# Altium PCB PCB_Timer.PcbDoc
Units mm, origin at the board's own origin, x right, y up, seen from the top; angles counter-clockwise.
Board outline 100 x 100 mm, 2 copper layers (Top Layer, Bottom Layer); 36 components, 40 nets, 182 pads, 0 vias.
Unrouted connection lines stored in the file: 4.
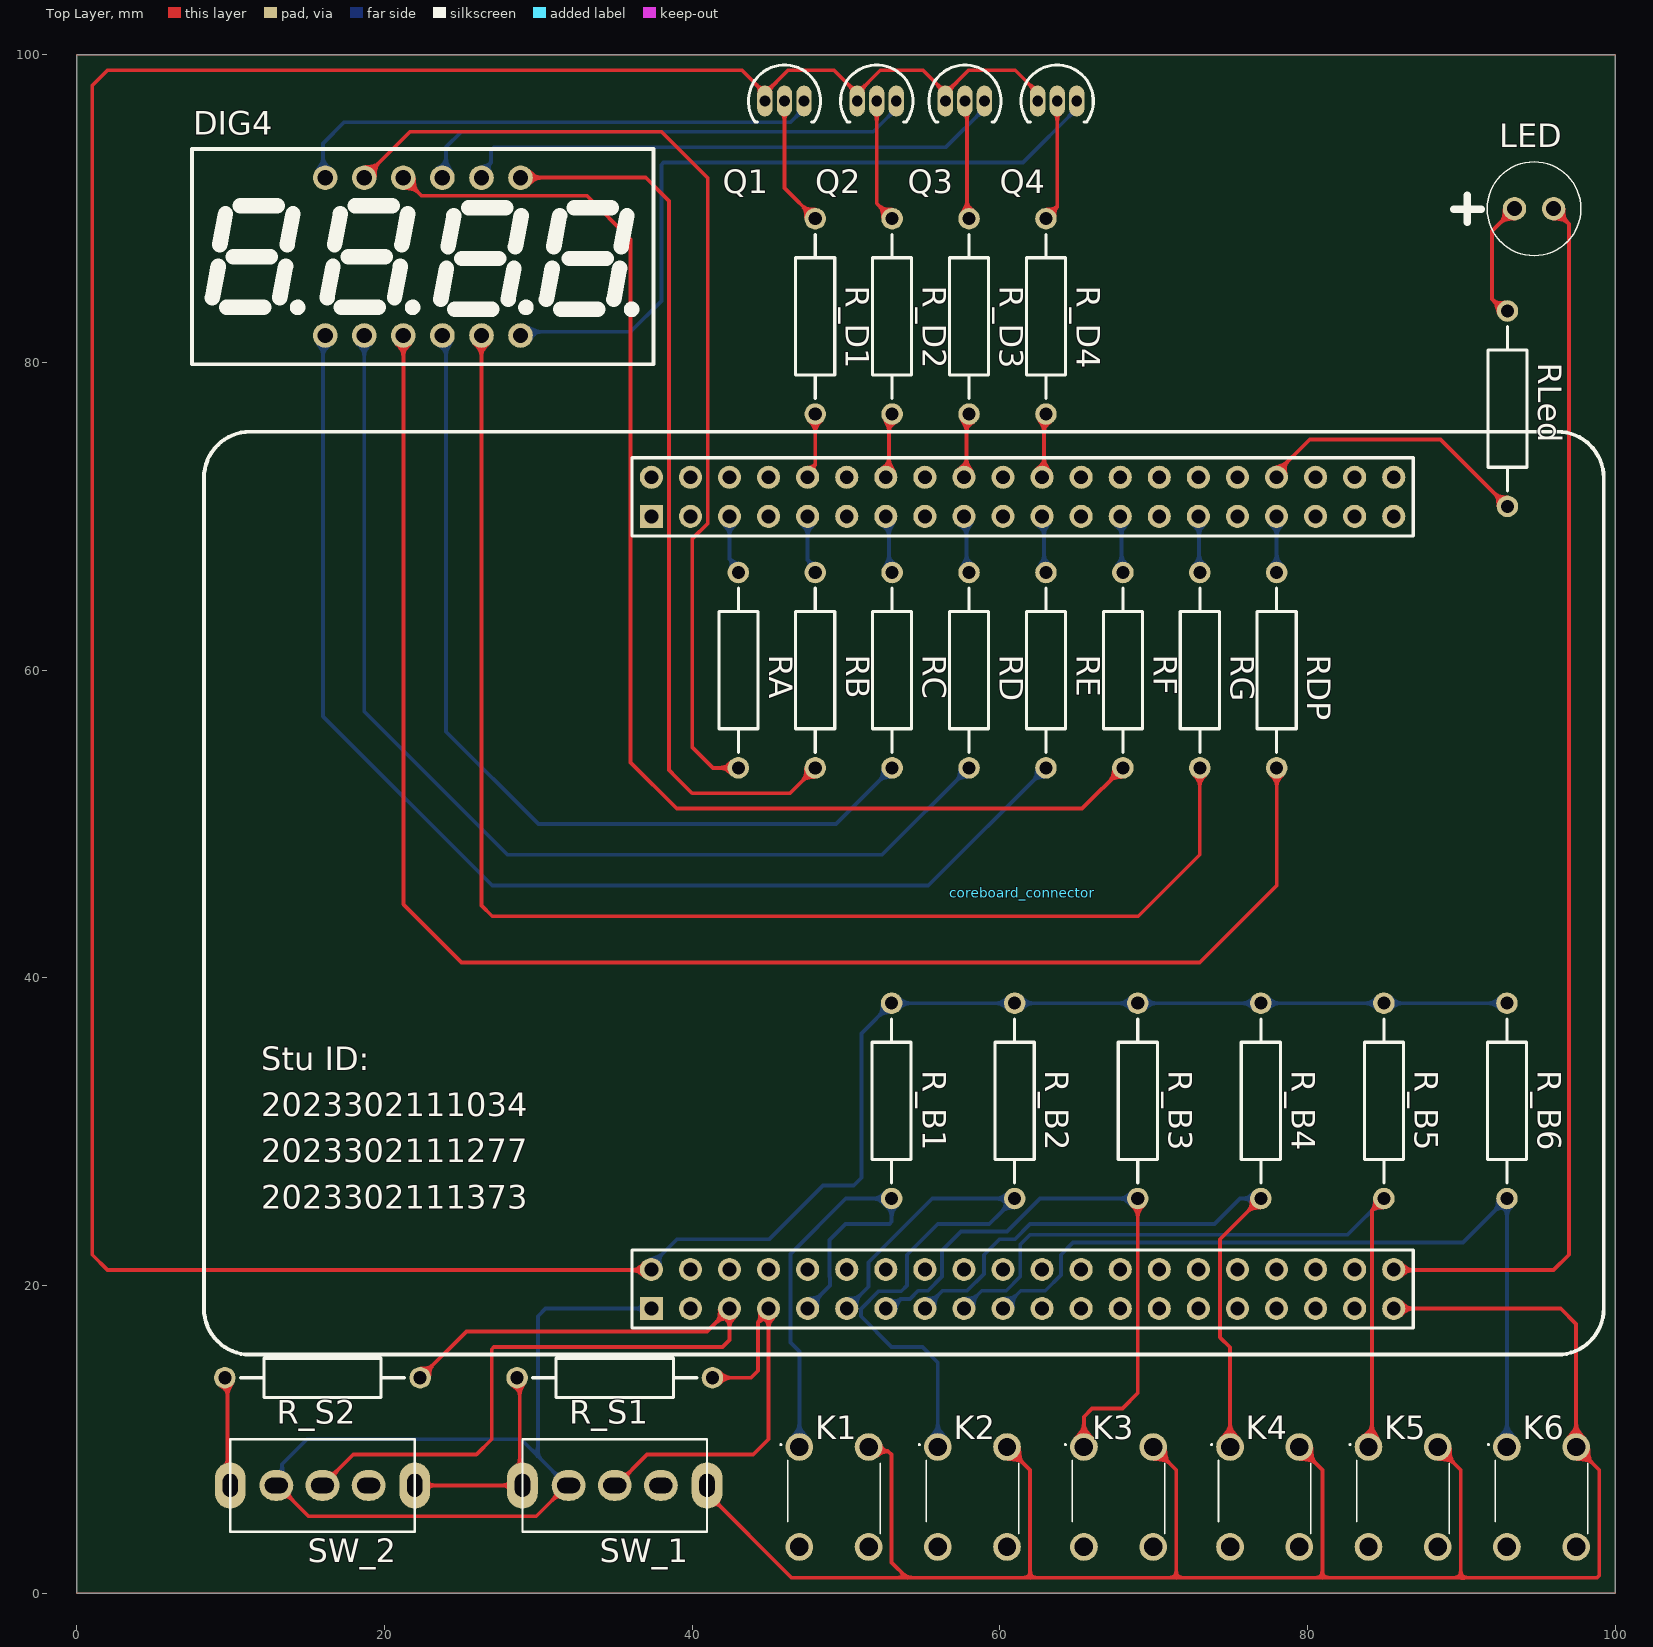
[diagram p0: Top Layer view]
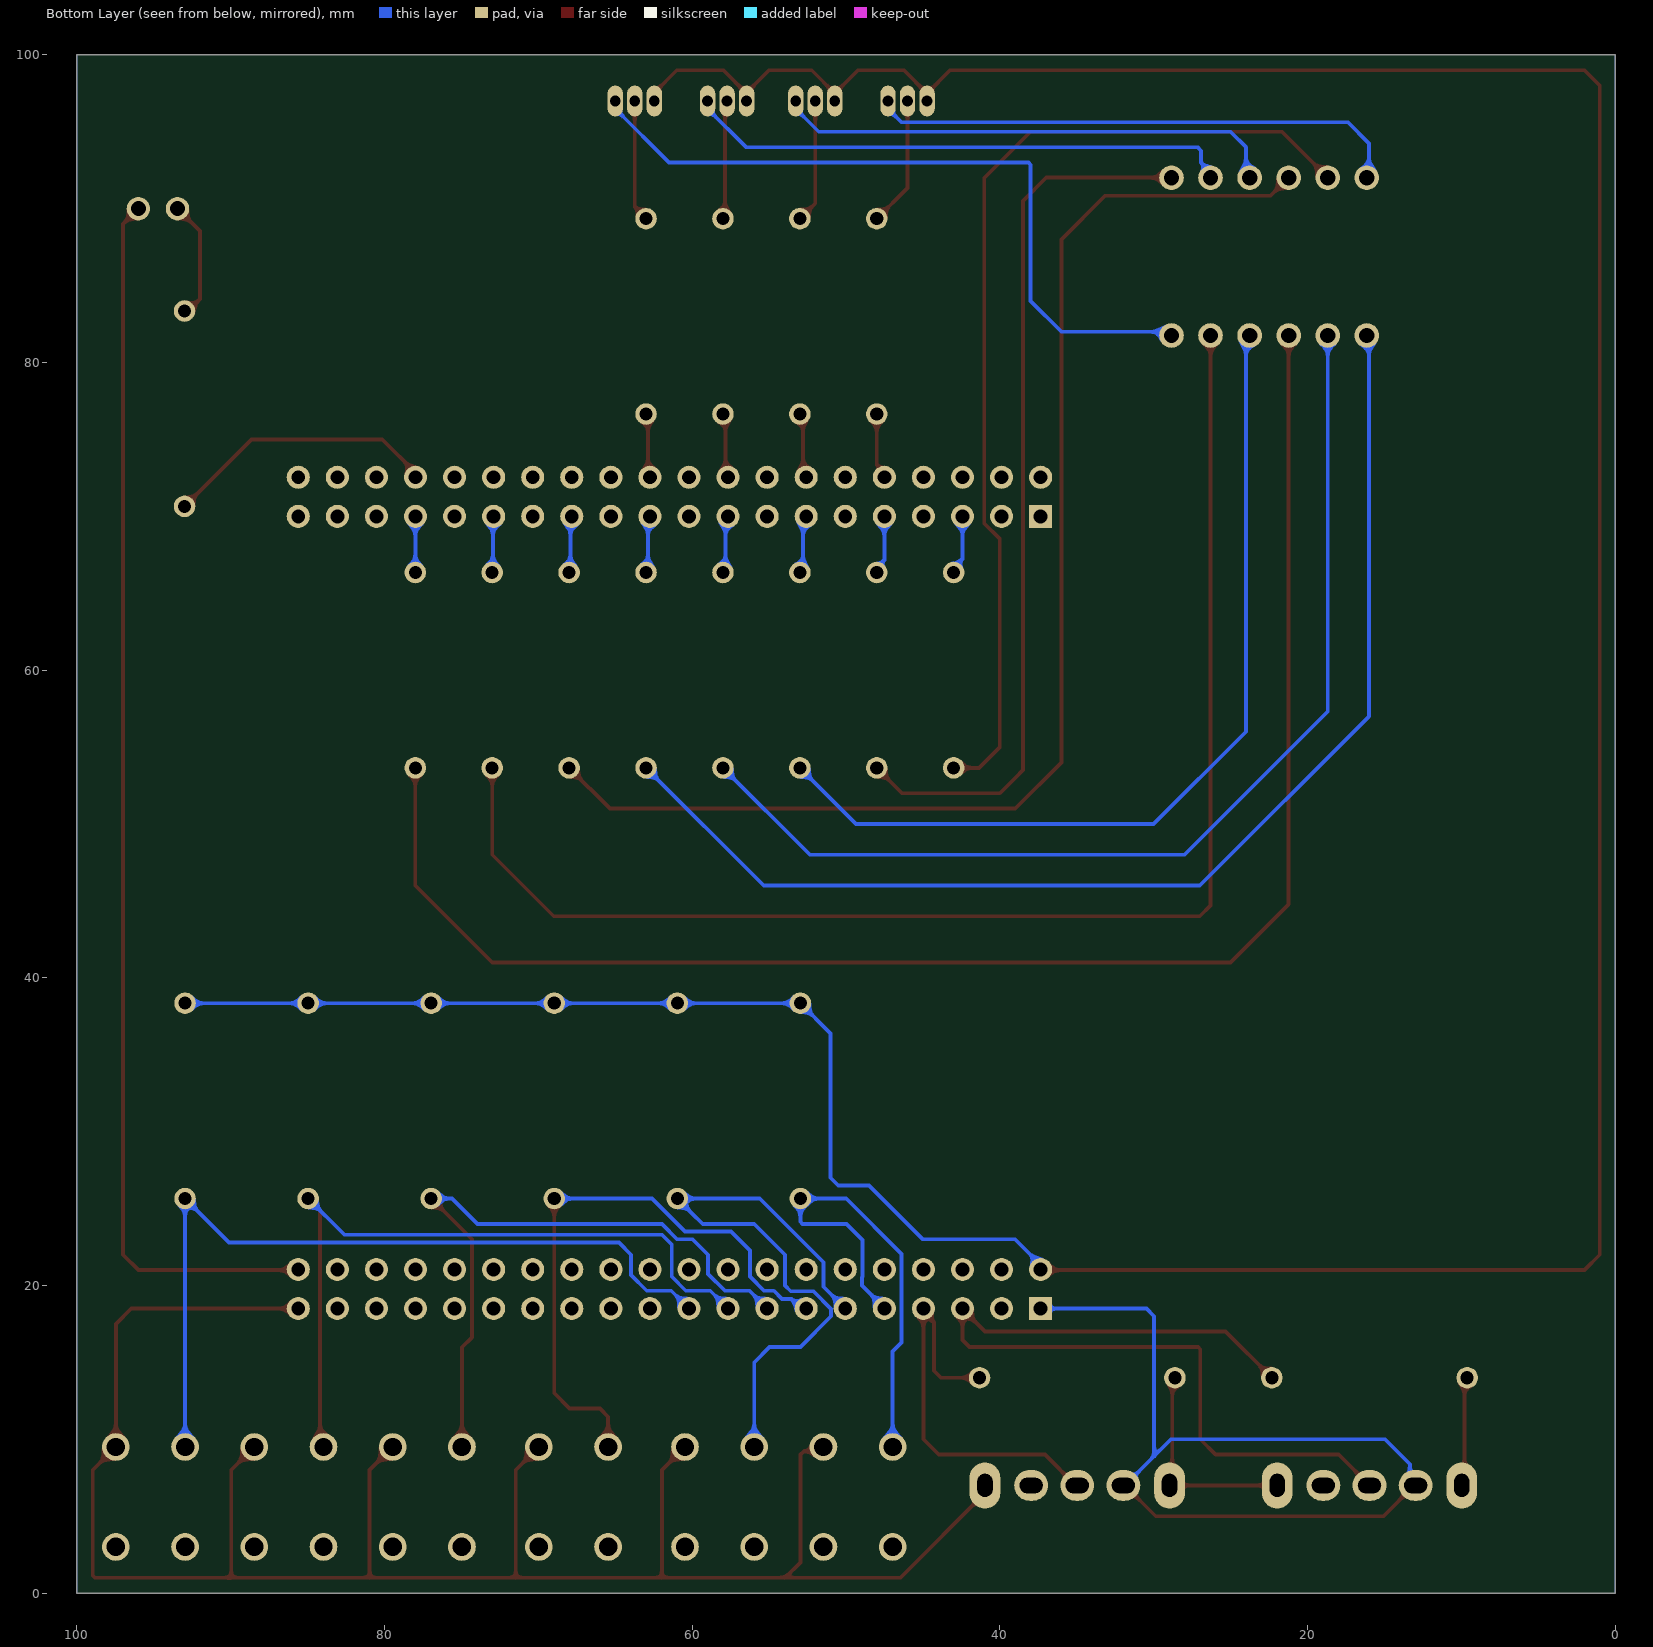
[diagram p1: Bottom Layer view, seen from below]

## Layer stack, top to bottom
Top Solder: solder mask 0.0102, Solder Resist, Dk 3.5
Top Layer: signal copper 0.0356
Dielectric 1: dielectric 0.32, FR-4, Dk 4.8
Bottom Layer: signal copper 0.0356
Bottom Solder: solder mask 0.0102, Solder Resist, Dk 3.5

## Board outline
0,0 100,0 100,100 0,100

## Design rules (kind name [scope] priority, off if disabled: settings)
Clearance [All] p1: gap=0.25 ignorepadtopadclearanceinfootprint=FALSE
PolygonConnect [All] p1: connectstyle=Relief reliefconductorwidth=0.254 reliefentries=4 polygonreliefangle="90 Angle" airgapwidth=0.254
RoutingVias [All] p1: holewidth=0.6 width=1 viastyle="Through Hole" minholewidth=0.6 minwidth=1 maxholewidth=0.6 maxwidth=1
SolderMaskExpansion [All] p1: expansion=0.102
Width [All] p1: maxlimit=0.5 minlimit=0.25 preferedwidth=0.25
30 further rules are at their usual default settings.

## Components (designator, comment, footprint, x,y, rotation, side; value= is the part's Value field where it differs from the comment)
coreboard_connector "" coreboard_connector 37.347,18.5 r0 top locked
DIG4 "*" DIG-4 23,86 r0 top locked
K1 "" TS665CJ 46.967,9.5 r0 top locked
K2 "SW-PB" TS665CJ 55.967,9.5 r0 top locked
K3 "SW-PB" TS665CJ 65.467,9.5 r0 top locked
K4 "SW-PB" TS665CJ 74.967,9.5 r0 top locked
K5 "" TS665CJ 83.967,9.5 r0 top locked
K6 "" TS665CJ 92.967,9.5 r0 top locked
LED "蓝" LED_TH_HLMP4700 93.46,90 r0 top (schematic designator D1)
Q1 "S8550" TO-92 46,97 r270 top locked
Q2 "S8550" TO-92 52,97 r270 top locked
Q3 "S8550" TO-92 57.73,97 r270 top locked
Q4 "S8550" TO-92 63.73,97 r270 top locked
R_B1 "10K" AXIAL-0.5 52.967,32 r270 top locked
R_B2 "10K" AXIAL-0.5 60.967,32 r90 top locked
R_B3 "10K" AXIAL-0.5 68.967,32 r90 top locked
R_B4 "10K" AXIAL-0.5 76.967,32 r270 top locked
R_B5 "10K" AXIAL-0.5 84.967,32 r90 top locked
R_B6 "10K" AXIAL-0.5 92.967,32 r90 top locked
R_D1 "470R" AXIAL-0.5 48,83 r90 top locked
R_D2 "470R" AXIAL-0.5 53,83 r90 top locked
R_D3 "470R" AXIAL-0.5 58,83 r90 top locked
R_D4 "470R" AXIAL-0.5 63,83 r90 top locked
R_S1 "10K" AXIAL-0.5 34.967,14 r0 top locked
R_S2 "10K" AXIAL-0.5 15.967,14 r0 top locked
RA "" AXIAL-0.5 43,60 r90 top locked value=100R
RB "" AXIAL-0.5 48,60 r90 top locked value=100R
RC "" AXIAL-0.5 53,60 r90 top locked value=100R
RD "" AXIAL-0.5 58,60 r90 top locked value=100R
RDP "" AXIAL-0.5 78,60 r90 top locked value=100R
RE "" AXIAL-0.5 63,60 r90 top locked value=100R
RF "" AXIAL-0.5 68,60 r90 top locked value=100R
RG "" AXIAL-0.5 73,60 r90 top locked value=100R
RLed "" AXIAL-0.5 93,77 r90 top locked value=10K
SW_1 "" SW-DP_5P_W 34.967,7 r0 top locked
SW_2 "" SW-DP_5P_W 15.967,7 r0 top locked

## Footprints (in the part's own frame and the unit in brackets; to place one, negate y for a bottom-side part, rotate by r counter-clockwise, add the part's x,y. Pads: shape width x height; smd on the part's side, far side on the other; paste and mask are expansions set on the pad)
AXIAL-0.5 [mm] "Axial Device, Thru-Hole; 2 Leads; 0.5 in Pin Spacing"
  round 1.4 hole 0.85: 1(-6.35,0) 2(6.35,0)
  silkscreen extent -5.33,-1.27 5.33,1.27
coreboard_connector [mm] "Connector; Header40; 20x2 Position"
  rect 1.5x1.5 hole 0.9: 1(0,0) 41(0,51.5)
  round 1.5 hole 0.9: 2(0,2.54) 3(2.54,0) 4(2.54,2.54) 5(5.08,0) 6(5.08,2.54) 7(7.62,0) 8(7.62,2.54) 9(10.16,0) 10(10.16,2.54) 11(12.7,0) 12(12.7,2.54) 13(15.24,0) 14(15.24,2.54) 15(17.78,0) 16(17.78,2.54) 17(20.32,0) 18(20.32,2.54) 19(22.86,0) 20(22.86,2.54) 21(25.4,0) 22(25.4,2.54) 23(27.94,0) 24(27.94,2.54) 25(30.48,0) 26(30.48,2.54) 27(33.02,0) 28(33.02,2.54) 29(35.56,0) 30(35.56,2.54) 31(38.1,0) 32(38.1,2.54) 33(40.64,0) 34(40.64,2.54) 35(43.18,0) 36(43.18,2.54) 37(45.72,0) 38(45.72,2.54) 39(48.26,0) 40(48.26,2.54) 42(0,54.04) 43(2.54,51.5) 44(2.54,54.04) 45(5.08,51.5) 46(5.08,54.04) 47(7.62,51.5) 48(7.62,54.04) 49(10.16,51.5) 50(10.16,54.04) 51(12.7,51.5) 52(12.7,54.04) 53(15.24,51.5) 54(15.24,54.04) 55(17.78,51.5) 56(17.78,54.04) 57(20.32,51.5) 58(20.32,54.04) 59(22.86,51.5) 60(22.86,54.04) 61(25.4,51.5) 62(25.4,54.04) 63(27.94,51.5) 64(27.94,54.04) 65(30.48,51.5) 66(30.48,54.04) 67(33.02,51.5) 68(33.02,54.04) 69(35.56,51.5) 70(35.56,54.04) 71(38.1,51.5) 72(38.1,54.04) 73(40.64,51.5) 74(40.64,54.04) 75(43.18,51.5) 76(43.18,54.04) 77(45.72,51.5) 78(45.72,54.04) 79(48.26,51.5) 80(48.26,54.04)
  silkscreen extent -29.09,-3 61.91,57, body extent -1.27,-1.27 49.53,55.31, height 7.58
DIG-4 [mm]
  round 1.6 hole 1 mask+0.051: 1(-6.858,-4.241) 2(-4.318,-4.241) 3(-1.778,-4.241) 4(0.762,-4.241) 5(3.302,-4.241) 6(5.842,-4.241) 7(5.842,6.019) 8(3.302,6.019) 9(0.762,6.019) 10(-1.778,6.019) 11(-4.318,6.019) 12(-6.858,6.019)
  silkscreen extent -15.51,-6.11 14.49,7.89
LED_TH_HLMP4700 [mm]
  round 1.521 hole 0.978: 1(0,0) 2(2.54,0)
  silkscreen extent -3.94,-3.05 4.32,3.05, body extent -1.66,-2.9 4.14,2.9, height 9.6
SW-DP_5P_W [mm]
  oval 2x3 hole 1 slot 1.5 at 90 deg: 0(-6,0) 0(6,0)
  oval 2.2x2 hole 1 slot 1.5 at 0 deg: 1(0,0) 2(-3,0) 3(3,0)
  silkscreen extent -6,-3 6,3
TO-92 [mm]
  oval 2x1 hole 0.7: 1(0,-1.27) 2(0,0) 3(0,1.27)
  silkscreen extent -2.34,-2.34 1.35,2.34
TS665CJ [mm]
  round 1.8 hole 1.2: A1(0,0) B1(4.5,0) C1(0,-6.5) D1(4.5,-6.5)
  silkscreen extent -1.25,-5.65 5.25,0.2, body extent -0.75,-6.9 5.25,0.4, height 5.25

## Part data
coreboard_connector: library part "J1 & J2"
DIG4: library part DIG-4
K1 K5 K6: library part SW-PB, "Switch", LatestRevisionDate=17-Jul-2002, LatestRevisionNote="Re-released for DXP Platform.", PackageDescription="Switch; 2 Leads", PackageReference=SPST-2, Published=24-Mar-1999, Publisher="Altium Limited"
K2 K3 K4: "Switch", LatestRevisionDate=17-Jul-2002, LatestRevisionNote="Re-released for DXP Platform.", PackageDescription="Switch; 2 Leads", PackageReference=SPST-2, Published=24-Mar-1999, Publisher="Altium Limited"
LED: library part LED1, "Typical RED GaAs LED", LatestRevisionDate=08-Jul-2005, LatestRevisionNote="Mech Layer 1 removed.", PackageDescription="LED; 2 Leads", PackageReference=LED-1, Published=8-Jun-2000, Publisher="Altium Limited"
Q1 Q2 Q3 Q4: library part 2N3906, "PNP General Purpose Amplifier", ComponentLink1Description="Manufacturer Link", ComponentLink1URL=http://www.fairchildsemi.com/, ComponentLink2Description=Datasheet, ComponentLink2URL=http://www.fairchildsemi.com/ds/2N%2F2N3906.pdf, DatasheetVersion=1997, LatestRevisionDate=15-Jan-2003, LatestRevisionNote="PCB Footprint 'BCY-W3/D4.7' replaced", PackageDescription="TO, Flat Index; 3 In-Line, Axial Leads; Body Dia. 4.5mm; Leads 0.51 x 0.48 mm (max)", PackageReference=TO-92A, PackageVersion=Sep-1998, Published=8-Jun-2000, Publisher="Altium Limited"
R_B1 R_B2 R_B3 R_B4 R_B5 R_B6 R_S1 R_S2: library part AXIAL-0.5
R_D1 R_D2 R_D3 R_D4 RA RB RC RD RDP RE RF RG RLed: library part Res2, "Resistor", LatestRevisionDate=17-Jul-2002, LatestRevisionNote="Re-released for DXP Platform.", PackageDescription="Axial Device, Thru-Hole; 2 Leads; 0.4 in Pin Spacing", PackageReference=AXIAL-0.4, Published=8-Jun-2000, Publisher="Altium Limited"
SW_1 SW_2: library part SW-DP_5P_W

## Nets (pads, with @x,y where several pads share a name; then routed paths per layer and width w, separated by ;. In a path a pad name is that pad's centre, name@x,y a point inside that pad or via, vN(x,y) a via of type N, cw(c..) or ccw(c..) an arc to the next point about the centre after c; other vN are vias at no path point)
GND: coreboard_connector.39 coreboard_connector.40 K1.B1 K2.B1 K3.B1 K4.B1 K5.B1 K6.B1 LED.2 R_S1.1 R_S2.1 SW_1.0 SW_2.0 | length 238.3
  Top Layer w0.25: R_S2.1@9.522,14 R_S2.1 9.792,13.825 9.792,7.175 SW_2.0@9.967,7 ; SW_2.0@21.967,7 28.967,7 28.792,7.175 28.792,13.825 R_S1.1 ; SW_1.0@40.967,7 40.967,6.5 46.467,1 53.967,1 ; K1.B1 51.742,9.225 52.742,9.225 52.967,9 52.967,2 53.967,1 ; K2.B1 61.967,8 61.967,1 ; K3.B1 71.467,8 71.467,1 ; K4.B1 80.967,8 80.967,1 ; coreboard_connector.39 96.467,18.5 97.467,17.5 K6.B1 98.967,8 98.967,1.146 98.821,1 89.967,1 ; coreboard_connector.40 85.647,21 96,21 97,22 97,84 97,84.46 97,89 LED.2 ; K5.B1 89.967,8 89.967,1 ; 53.967,1 61.967,1 ; 61.967,1 71.467,1 ; 71.467,1 80.967,1 ; 80.967,1 89.967,1
Netcoreboard_connector_5: coreboard_connector.5 R_S2.2 SW_2.1 | length 57.8
  Top Layer w0.25: SW_2.1 17.967,9 25.967,9 26.967,10 26.967,15.854 27.113,16 41.967,16 42.427,16.46 coreboard_connector.5@42.427,18.46 ; R_S2.2 25.317,17 40.967,17 coreboard_connector.5@42.427,18.46 ; coreboard_connector.5 coreboard_connector.5@42.427,18.46
Netcoreboard_connector_7: coreboard_connector.7 R_S1.2 SW_1.1 | length 27
  Top Layer w0.25: SW_1.1 35.067,7 37.067,9 43.967,9 44.967,10 coreboard_connector.7@44.967,18.295 ; R_S1.2 43.821,14 44.274,14.454 44.274,17.602 coreboard_connector.7@44.967,18.295 ; coreboard_connector.7 coreboard_connector.7@44.967,18.295
Netcoreboard_connector_9: coreboard_connector.9 K1.A1 R_B1.2 | length 32
  Bottom Layer w0.25: K1.A1 46.967,15.713 46.382,16.298 46.382,22.046 49.986,25.65 R_B1.2 52.967,24.146 52.821,24 49.967,24 48.922,22.955 48.922,20.574 48.967,20.529 48.967,20 47.507,18.54 coreboard_connector.9
Netcoreboard_connector_11: coreboard_connector.11 K2.A1 R_B2.1 | length 41.6
  Bottom Layer w0.25: coreboard_connector.11 51.462,19.915 51.462,21.506 55.606,25.65 R_B2.1 60.069,24.752 59.317,24 55.967,24 53.967,22 53.967,20 53.592,19.625 52.121,19.625 50.967,18.471 50.967,18 52.967,16 54.967,16 55.967,15 K2.A1 K2.A1@56.252,9.785
Netcoreboard_connector_13: coreboard_connector.13 K3.A1 R_B3.1 | length 39.1
  Top Layer w0.25: K3.A1 65.467,11.467 66,12 67.967,12 68.967,13 R_B3.1
  Bottom Layer w0.25: coreboard_connector.13 52.925,18.5 53.55,19.125 54.161,19.125 54.693,19.657 55.335,19.657 56.252,20.574 56.252,22.285 57.467,23.5 60.467,23.5 62.617,25.65 R_B3.1
Netcoreboard_connector_15: coreboard_connector.15 K4.A1 R_B4.2 | length 43
  Top Layer w0.25: K4.A1 74.967,15.984 74.322,16.629 74.322,23.005 R_B4.2
  Bottom Layer w0.25: coreboard_connector.15 56.284,19.657 57.875,19.657 58.967,20.749 58.967,22 59.967,23 60.967,23 61.967,24 73.967,24 75.617,25.65 R_B4.2
Netcoreboard_connector_17: coreboard_connector.17 K5.A1 R_B5.1 | length 48.4
  Top Layer w0.25: K5.A1 84.192,9.725 84.192,24.875 R_B5.1
  Bottom Layer w0.25: coreboard_connector.17 58.824,19.657 60.415,19.657 61.332,20.574 61.332,22.658 61.967,23.293 82.61,23.293 R_B5.1 ; K5.A1 K5.A1@84.192,9.725
Netcoreboard_connector_19: coreboard_connector.19 K6.A1 R_B6.1 | length 52.7
  Bottom Layer w0.25: coreboard_connector.19 61.364,19.657 62.955,19.657 63.967,20.669 63.967,22 64.76,22.793 90.11,22.793 R_B6.1 K6.A1
Netcoreboard_connector_45: coreboard_connector.45 RA.2 | length 4.2
  Top Layer w0.25: RA.2 RA.2@43,66.661
  Bottom Layer w0.25: coreboard_connector.45 42.427,67.234 43,66.661 RA.2
Netcoreboard_connector_49: coreboard_connector.49 RB.2 | length 4.2
  Top Layer w0.25: RB.2 RB.2@48,66.661
  Bottom Layer w0.25: coreboard_connector.49 47.507,67.154 48,66.661 RB.2
Netcoreboard_connector_50: coreboard_connector.50 R_D1.1 | length 4.3
  Top Layer w0.25: coreboard_connector.50 47.507,72.878 48,73.371 R_D1.1
Netcoreboard_connector_53: coreboard_connector.53 RC.2 | length 4.4
  Top Layer w0.25: coreboard_connector.53 coreboard_connector.53@52.793,69.793 ; RC.2@52.793,66.557 RC.2
  Bottom Layer w0.25: coreboard_connector.53 52.793,69.793 52.793,66.557 RC.2
Netcoreboard_connector_54: coreboard_connector.54 R_D2.1 | length 4.3
  Top Layer w0.25: coreboard_connector.54 52.793,72.747 52.793,76.443 R_D2.1
Netcoreboard_connector_57: coreboard_connector.57 RD.2 | length 4.3
  Top Layer w0.25: coreboard_connector.57 coreboard_connector.57@57.833,69.833 ; RD.2@57.833,66.517 RD.2
  Bottom Layer w0.25: coreboard_connector.57 57.833,69.833 57.833,66.517 RD.2
Netcoreboard_connector_58: coreboard_connector.58 R_D3.1 | length 4.2
  Top Layer w0.25: coreboard_connector.58 57.833,72.707 57.833,76.483 R_D3.1
Netcoreboard_connector_61: coreboard_connector.61 RE.2 | length 4.1
  Top Layer w0.25: coreboard_connector.61 coreboard_connector.61@62.873,69.873 ; RE.2@62.873,66.477 RE.2
  Bottom Layer w0.25: coreboard_connector.61 62.873,69.873 62.873,66.477 RE.2
Netcoreboard_connector_62: coreboard_connector.62 R_D4.1 | length 4.2
  Top Layer w0.25: coreboard_connector.62 62.873,72.667 62.873,76.523 R_D4.1
Netcoreboard_connector_65: coreboard_connector.65 RF.2 | length 4
  Top Layer w0.25: coreboard_connector.65 coreboard_connector.65@67.913,69.913 ; RF.2@67.913,66.437 RF.2
  Bottom Layer w0.25: coreboard_connector.65 67.913,69.913 67.913,66.437 RF.2
Netcoreboard_connector_69: coreboard_connector.69 RG.2 | length 3.8
  Top Layer w0.25: coreboard_connector.69 coreboard_connector.69@72.953,69.953 ; RG.2@72.953,66.397 RG.2
  Bottom Layer w0.25: coreboard_connector.69 72.953,69.953 72.953,66.397 RG.2
Netcoreboard_connector_73: coreboard_connector.73 RDP.2 | length 3.7
  Top Layer w0.25: coreboard_connector.73 coreboard_connector.73@77.993,69.993 ; RDP.2@77.993,66.357 RDP.2
  Bottom Layer w0.25: coreboard_connector.73 77.993,69.993 77.993,66.357 RDP.2
Netcoreboard_connector_74: coreboard_connector.74 RLed.1 | length 18
  Top Layer w0.25: coreboard_connector.74@77.993,72.547 coreboard_connector.74 77.987,72.841 80.146,75 88.65,75 RLed.1
NetD1_1: LED.1 RLed.2 | length 7.8
  Top Layer w0.25: RLed.2 92.78,83.35 92,84.13 92,88.54 LED.1
NetDIG4_1: DIG4.1 RE.1 | length 79.5
  Bottom Layer w0.25: DIG4.1 16,81.617 16,57 27,46 55.35,46 RE.1
NetDIG4_2: DIG4.2 RD.1 | length 70
  Bottom Layer w0.25: DIG4.2 18.682,57.318 28,48 52.35,48 RD.1
NetDIG4_3: DIG4.3 RDP.1 | length 105
  Top Layer w0.25: DIG4.3 21.222,44.778 25,41 73,41 78,46 RDP.1
NetDIG4_4: DIG4.4 RC.1 | length 58.9
  Bottom Layer w0.25: DIG4.4 24,81.521 24,56 30,50 49.35,50 RC.1
NetDIG4_5: DIG4.5 RG.1 | length 91.4
  Top Layer w0.25: DIG4.5 26.302,44.698 27,44 69,44 73,48 RG.1
NetDIG4_6: DIG4.6 Q4.3 | length 48
  Bottom Layer w0.25: DIG4.6 29.083,82 36,82 38,84 38,92.854 38.146,93 61.5,93 65,96.5 Q4.3
NetDIG4_7: DIG4.7 RB.1 | length 58.1
  Top Layer w0.25: DIG4.7 36.981,92.019 38.5,90.5 38.5,53.5 39,53 40,52 46.35,52 RB.1
NetDIG4_8: DIG4.8 Q3.3 | length 35.7
  Bottom Layer w0.25: DIG4.8 26.302,92.384 26.914,92.996 26.914,93.767 27.146,94 56.5,94 59,96.5 Q3.3
NetDIG4_9: DIG4.9 Q2.3 | length 32.9
  Bottom Layer w0.25: DIG4.9 24,92.257 24,94 25,95 51.77,95 53.27,96.5 Q2.3
NetDIG4_10: DIG4.10 RF.1 | length 84.8
  Top Layer w0.25: DIG4.10 22.397,90.844 33.156,90.844 36,88 36,54 39,51 65.35,51 RF.1
NetDIG4_11: DIG4.11 RA.1 | length 65.8
  Top Layer w0.25: DIG4.11 21.663,95 38,95 41.012,91.988 41.012,69.534 40,68.522 40,55 41.35,53.65 RA.1
NetDIG4_12: DIG4.12 Q1.3 | length 35
  Bottom Layer w0.25: DIG4.12 16,92.161 16,94.25 17.375,95.625 46.395,95.625 47.27,96.5 Q1.3
NetQ1_2: Q1.2 R_D1.2 | length 8.5
  Top Layer w0.25: Q1.2 46,91.35 R_D1.2
NetQ2_2: Q2.2 R_D2.2 | length 8.1
  Top Layer w0.25: Q2.2 52,90.35 R_D2.2
NetQ3_2: Q3.2 R_D3.2 | length 7.8
  Top Layer w0.25: Q3.2 57.865,96.865 57.865,89.485 R_D3.2
NetQ4_2: Q4.2 R_D4.2 | length 8
  Top Layer w0.25: R_D4.2 63,89.41 63.73,90.14 Q4.2
VCC: coreboard_connector.1 coreboard_connector.2 Q1.1 Q2.1 Q3.1 Q4.1 R_B1.1 R_B2.2 R_B3.2 R_B4.1 R_B5.2 R_B6.2 SW_1.2 SW_2.2 | length 309.1
  Top Layer w0.25: SW_2.2 13.067,7 15.067,5 29.867,5 31.867,7 SW_1.2 ; coreboard_connector.2@37.347,21.201 coreboard_connector.2 37.307,21 2,21 1,22 1,98 2,99 43.23,99 Q1.1@44.73,97.5 ; Q1.1 Q1.1@44.73,97.5 ; Q2.1 Q2.1@50.73,97.5 ; Q3.1 Q3.1@56.46,97.5 ; Q4.1 62.46,97.54 61,99 57.96,99 Q3.1@56.46,97.5 ; Q1.1@44.73,97.5 46.23,99 49.23,99 Q2.1@50.73,97.5 ; Q2.1@50.73,97.5 52.23,99 55,99 56.46,97.54 Q3.1@56.46,97.5
  Bottom Layer w0.25: SW_2.2 13.342,7.375 13.342,8.375 14.967,10 28.867,10 29.967,8.9 ; SW_1.2 31.867,7 29.967,8.9 ; coreboard_connector.1 30.467,18.5 29.967,18 29.967,8.9 ; coreboard_connector.2 37.347,21.347 39,23 45,23 48.5,26.5 50.5,26.5 51,27 51,36.383 R_B1.1 R_B2.2 R_B3.2 R_B4.1 R_B5.2 R_B6.2
pads on no net: coreboard_connector.3 coreboard_connector.4 coreboard_connector.6 coreboard_connector.8 coreboard_connector.10 coreboard_connector.12 coreboard_connector.14 coreboard_connector.16 coreboard_connector.18 coreboard_connector.20 coreboard_connector.21 coreboard_connector.22 coreboard_connector.23 coreboard_connector.24 coreboard_connector.25 coreboard_connector.26 coreboard_connector.27 coreboard_connector.28 coreboard_connector.29 coreboard_connector.30 coreboard_connector.31 coreboard_connector.32 coreboard_connector.33 coreboard_connector.34 coreboard_connector.35 coreboard_connector.36 coreboard_connector.37 coreboard_connector.38 coreboard_connector.41 coreboard_connector.42 coreboard_connector.43 coreboard_connector.44 coreboard_connector.46 coreboard_connector.47 coreboard_connector.48 coreboard_connector.51 coreboard_connector.52 coreboard_connector.55 coreboard_connector.56 coreboard_connector.59 coreboard_connector.60 coreboard_connector.63 coreboard_connector.64 coreboard_connector.66 coreboard_connector.67 coreboard_connector.68 coreboard_connector.70 coreboard_connector.71 coreboard_connector.72 coreboard_connector.75 coreboard_connector.76 coreboard_connector.77 coreboard_connector.78 coreboard_connector.79 coreboard_connector.80 K1.C1 K1.D1 K2.C1 K2.D1 K3.C1 K3.D1 K4.C1 K4.D1 K5.C1 K5.D1 K6.C1 K6.D1 SW_1.3 SW_2.3

## Polygon pours and split planes (outlines as drawn)
no net on Bottom Layer "NONET_L02_P018" (solid, pour order 18): 0,100 100,100 100,0 0,0
no net on Bottom Layer "Bottom Layer-No Net" (solid, pour order 16): 0,101
no net on Top Layer "NONET_L01_P014" (solid, pour order 14): 0,100 100,100 100,0 0,0

## Silkscreen, mask and mechanical layers (free items; w line width, h text height)
Top Overlay:
  text "Stu ID:" at 12,34 h1.52
  text "2023302111034" at 12,31 h1.52
  text "2023302111277" at 12,28 h1.52
  text "2023302111373" at 12,25 h1.52

## Dimensions
100,100 to 100,0 on Top Overlay
0,100 to 100,100 on Top Overlay